# Altium PCB PCB1.PcbDoc
Units mm, origin at the board's own origin, x right, y up, seen from the top; angles counter-clockwise.
Board outline 98.3 x 69.21 mm, 2 copper layers (Top Layer, Bottom Layer); 57 components, 38 nets, 166 pads, 12 vias.
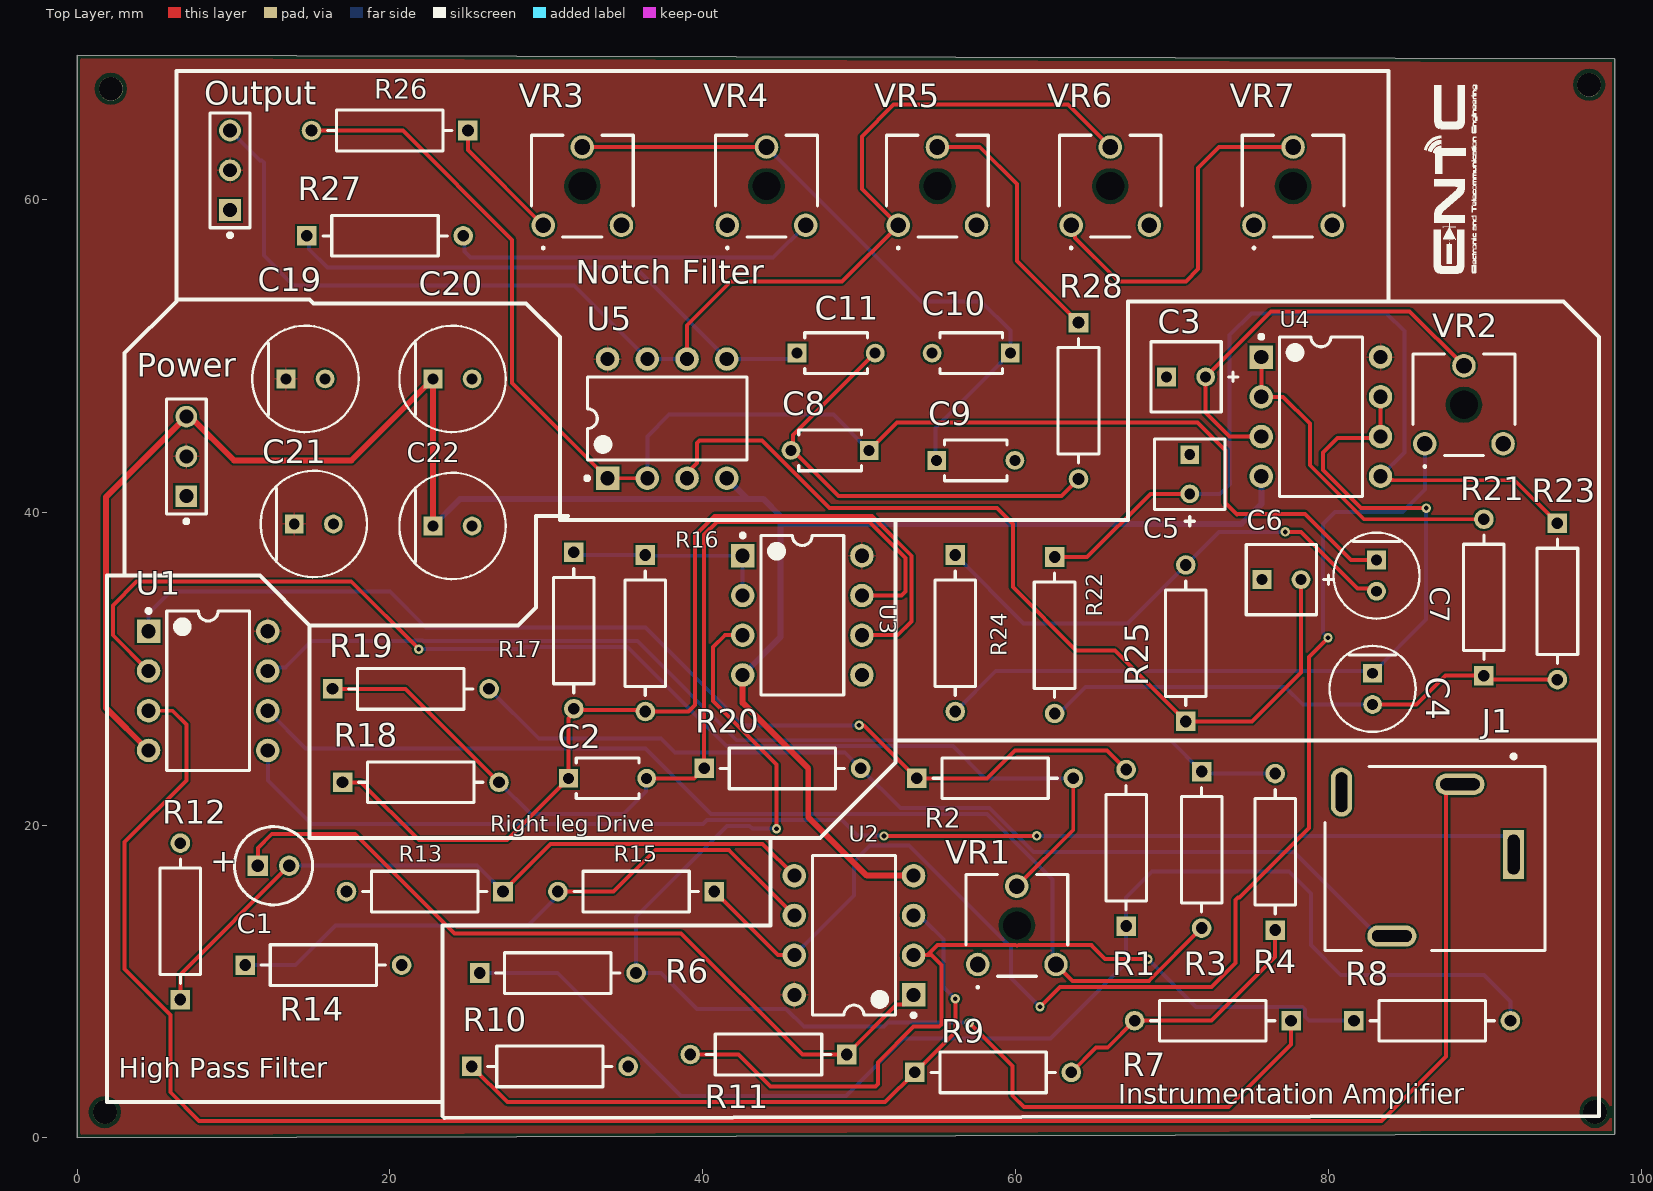
[diagram p0: Top Layer view]
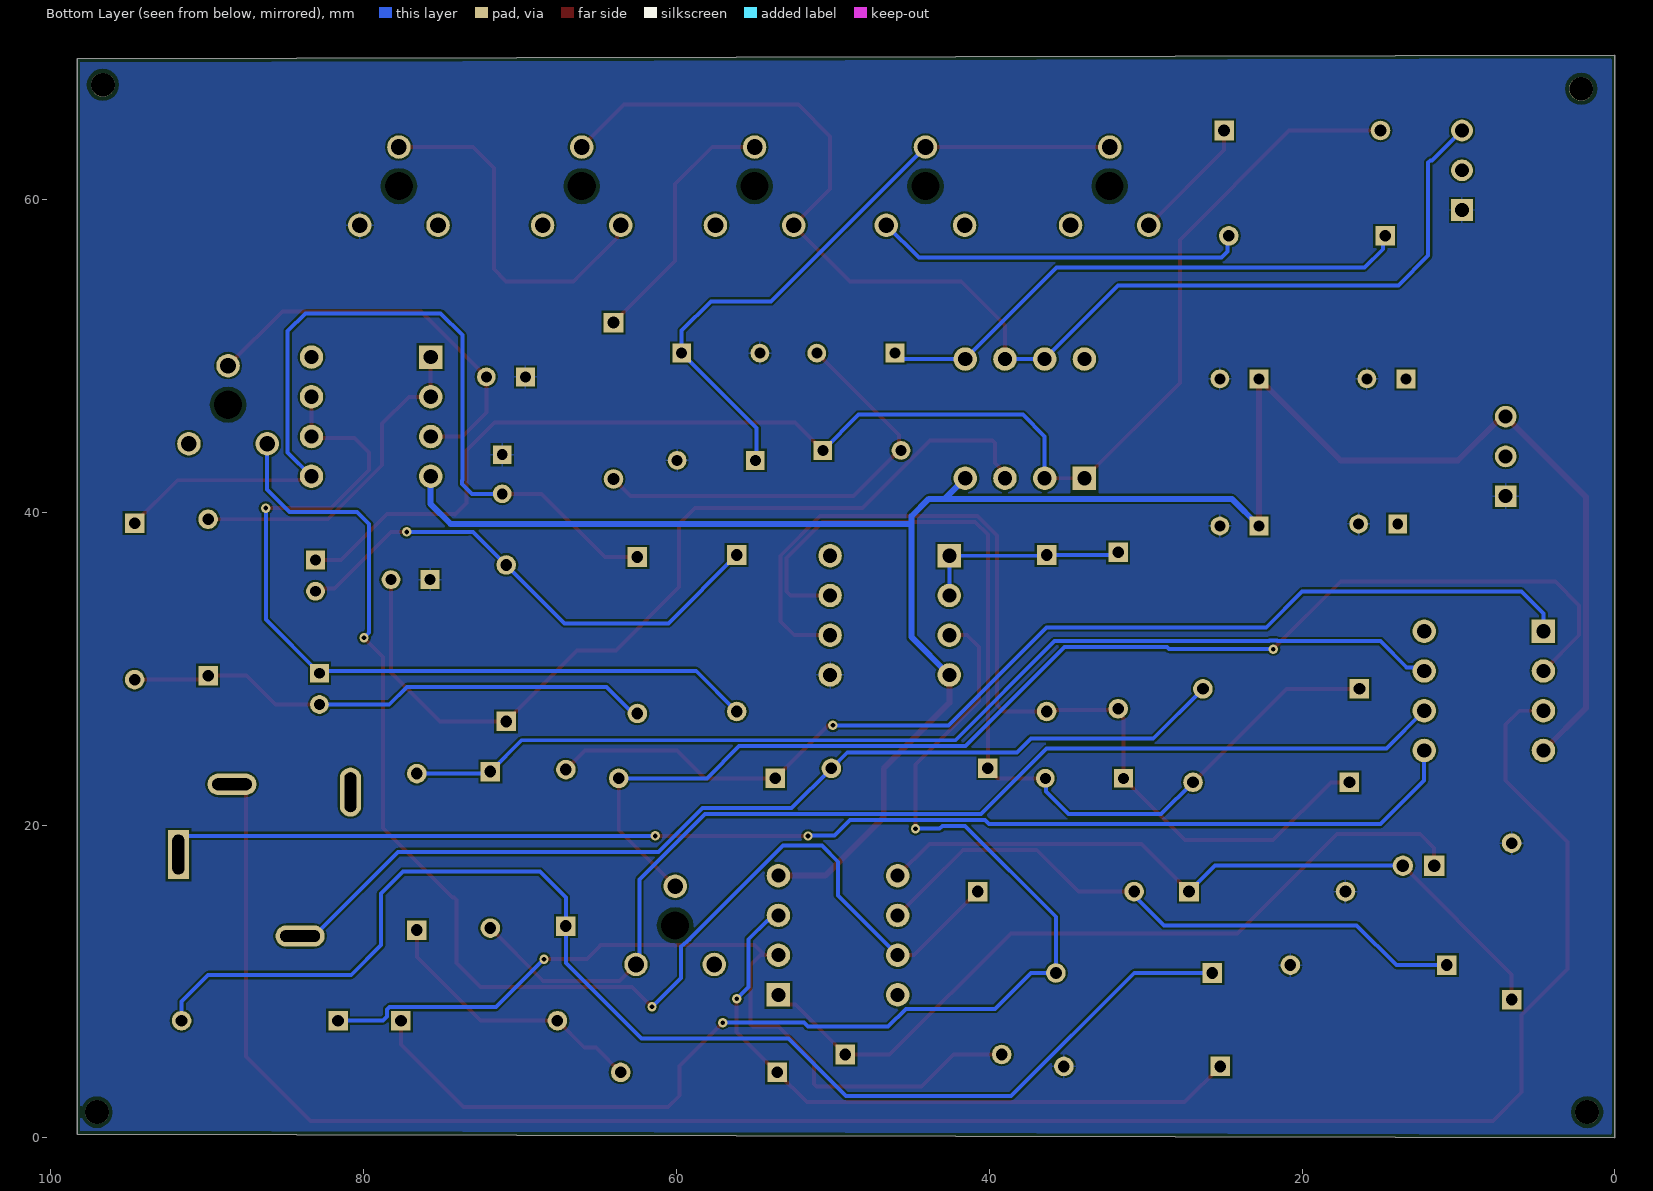
[diagram p1: Bottom Layer view, seen from below]
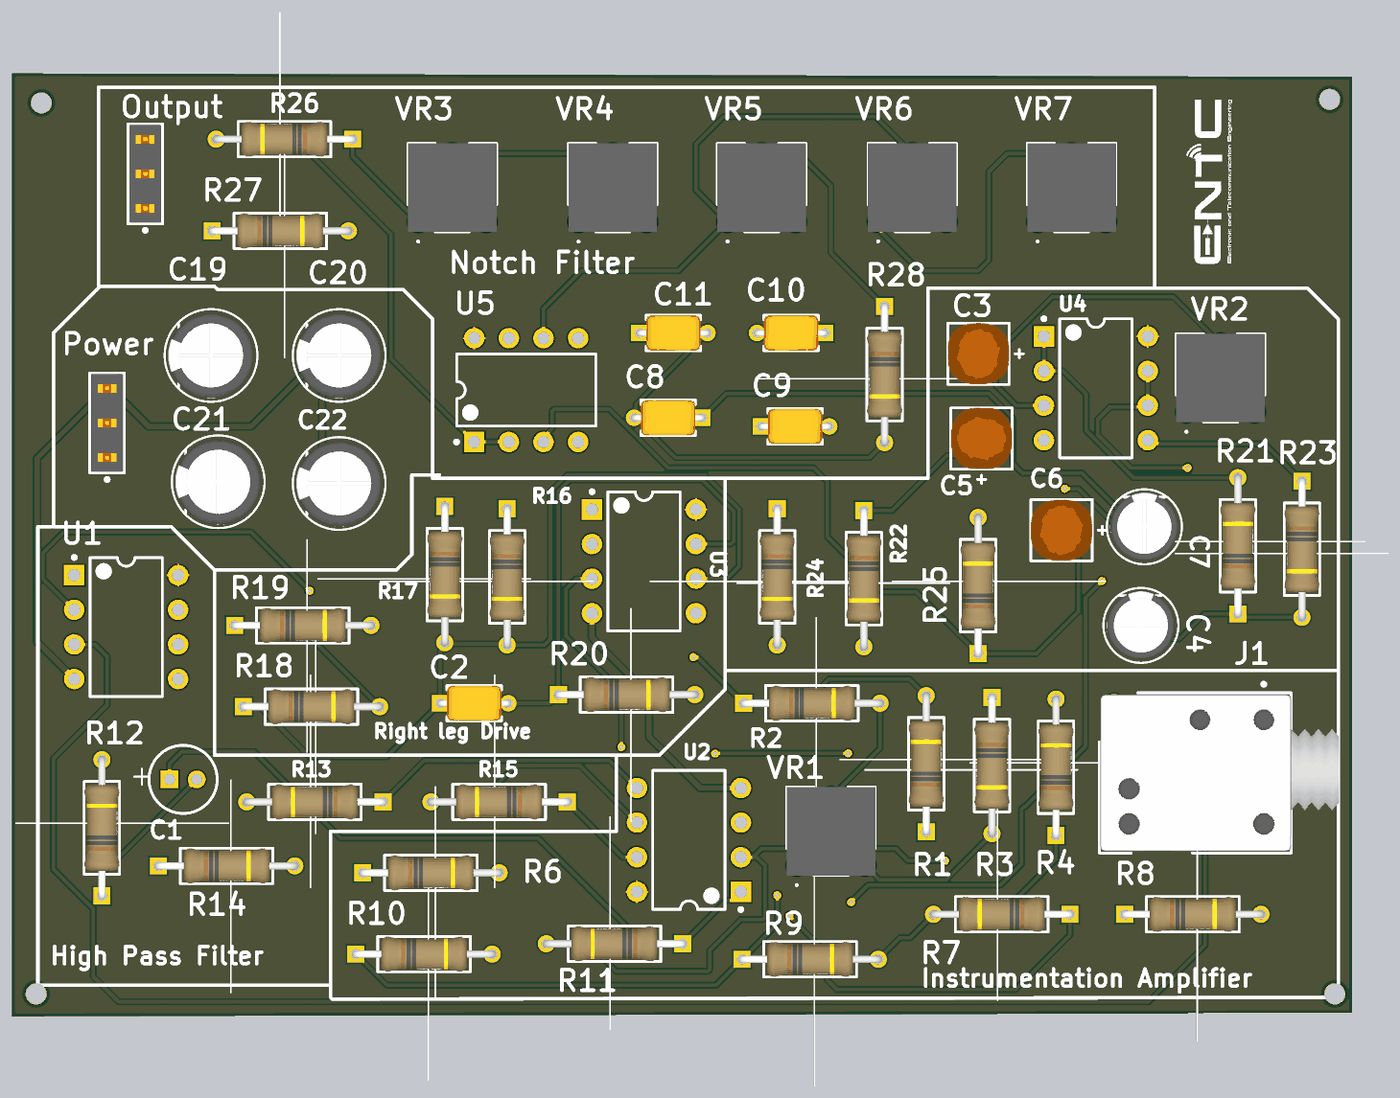
[diagram p2: 3D render of the assembled board from above, using the file's embedded part models]

## Layer stack, top to bottom
Top Solder: solder mask 0.0102, Solder Resist, Dk 3.5
Top Layer: signal copper 0.0356
Dielectric 1: dielectric 0.32, FR-4, Dk 4.8
Bottom Layer: signal copper 0.0356
Bottom Solder: solder mask 0.0102, Solder Resist, Dk 3.5

## Board outline
0,0 98.298,0.247 98.298,68.968 0,69.215

## Design rules (kind name [scope] priority, off if disabled: settings)
BoardOutlineClearance [All] p1: gap=0.2 ignorepadtopadclearanceinfootprint=FALSE
Clearance [All] p1: gap=0.127 ignorepadtopadclearanceinfootprint=FALSE except(0.25: Arc-Hole Track-Hole SMDPad-Hole THPad-Hole Via-Hole Fill-Hole Poly-Hole Region-Hole Text-Hole)
ComponentClearance [All] p1: gap=0.127 collisioncheckmode=3 verticalgap=0.127 showdistances=TRUE
DiffPairsRouting [All] p1: maxlimit=0.254 minlimit=0.127 mostfreqgap=0.127 toplayer_minwidth=0.127 toplayer_maxwidth=25.4 toplayer_prefwidth=0.127 bottomlayer_minwidth=0.127 bottomlayer_maxwidth=25.4 bottomlayer_prefwidth=0.127 maxuncoupledlength=12.7
Height [All] p1: minheight=0 maxheight=1816.048 prefheight=12.7
HoleSize [All] p1: absolutevalues=TRUE maxlimit=6.3 minlimit=0.3 maxpercent=80.000 minpercent=20.000
HoleToHoleClearance [All] p1: gap=0.25 allowstackedmicrovias=FALSE
MinimumAnnularRing [All] p1: minimumring=0.076
MinimumSolderMaskSliver [All] p1: minsoldermaskwidth=0
PlaneClearance [All] p1: clearance=0.127
PlaneConnect PlaneConnectPowerPads [InPadClass('PowerPads')] p1: planeconnectstyle=Direct reliefexpansion=0.508 reliefentries=4 reliefconductorwidth=0.254 reliefairgap=0.254
PlaneConnect [All] p2: pad.planeconnectstyle=Relief pad.reliefexpansion=0.3 pad.reliefentries=4 pad.reliefconductorwidth=0.127 pad.reliefairgap=0.127 via.planeconnectstyle=Direct via.reliefexpansion=0.3 via.reliefentries=4 via.reliefconductorwidth=0.127 via.reliefairgap=0.127
PolygonConnect PolygonConnectPowerPads [All vs (InPadClass('PowerPads'))] p1: connectstyle=Direct reliefconductorwidth=0.254 reliefentries=4 polygonreliefangle="90 Angle" airgapwidth=0.254
PolygonConnect [All] p2: thpad.connectstyle=Relief thpad.reliefconductorwidth=0.127 thpad.reliefentries=4 thpad.polygonreliefangle="90 Angle" thpad.airgapwidth=0.127 smdpad.connectstyle=Relief smdpad.reliefconductorwidth=0.127 smdpad.reliefentries=4 smdpad.polygonreliefangle="90 Angle" smdpad.airgapwidth=0.127 via.connectstyle=Direct via.reliefconductorwidth=0.127 via.reliefentries=4 via.polygonreliefangle="90 Angle" via.airgapwidth=0.127
RoutingVias [All] p1: holewidth=0.3 width=0.6 viastyle="Through Hole" minholewidth=0.3 minwidth=0.6 maxholewidth=0.6 maxwidth=6.6
SilkToSilkClearance [All] p1: silktosilkclearance=0
SilkToSolderMaskClearance [IsPad] p1: minsilkscreentomaskgap=0.127 clearancetoexposedcopper=TRUE
SolderMaskExpansion [All] p1: expansion=0.075 istentingtop=FALSE
Width Width_1 [InNet('-Vcc')] p1: maxlimit=0.5 minlimit=0.254 preferedwidth=0.381 minimp=50.000000 maximp=50.000000 favimp=50.000000
Width [All] p2: maxlimit=25.4 minlimit=0.127 preferedwidth=0.254 minimp=50.000000 maximp=50.000000 favimp=50.000000
20 further rules are at their usual default settings.

## Classes and differential pairs
component class notch+out: C8 C9 C10 C11 Output R26 R27 R28 VR3 VR4 VR5 VR6 VR7
component class LowPassFilter: C3 C4 C5 C6 C7 R21 R22 R23 R24 R25 U4 U5 VR2
component class legdrive: C2 R16 R17 R18 R19 R20 U3
component class InstrumentalAmplifier+in: C19 C20 C21 C22 J1 Power R1 R2 R3 R4 R6 R7 R8 R9 R10 R11 U1 U2 VR1
component class HighPassFilter: C1 R12 R13 R14 R15

## Components (designator, comment, footprint, x,y, rotation, side; value= is the part's Value field where it differs from the comment)
C1 "ECA1HM100" CAPPR55-200-1100X500X1200 12.557,17.399 r0 top
C2 "0.1uF" FP-K15H5-MFG 33.909,22.987 r0 top
C3 "1uF" FP-TAP105K035SCS-MFG 70.886,48.641 r0 top
C4 "0.47uF" FP-RAD-TH-D_5_0_5-L_11_1-MFG 82.804,28.702 r270 top
C5 "1uF" FP-TAP105K035SCS-MFG 71.12,42.418 r270 top
C6 "1uF" FP-TAP105K035SCS-MFG 76.982,35.687 r0 top
C7 "0.47uF" FP-RAD-TH-D_5_0_5-L_11_1-MFG 83.058,35.941 r270 top
C8 ".1uF" FP-K15H5-MFG 48.133,43.942 r180 top
C9 ".1uF" FP-K15H5-MFG 57.444,43.307 r0 top
C10 ".1uF" FP-K15H5-MFG 57.15,50.165 r180 top
C11 ".1uF" FP-K15H5-MFG 48.514,50.165 r0 top
C19 "100uF" FP-RAD-TH-D_6_3_0_5-L_11-MFG 14.605,48.514 r0 top
C20 "100uF" FP-RAD-TH-D_6_3_0_5-L_11-MFG 24.003,48.514 r0 top
C21 "100uF" FP-RAD-TH-D_6_3_0_5-L_11-MFG 15.133,39.243 r0 top
C22 "100uF" FP-RAD-TH-D_6_3_0_5-L_11-MFG 24.003,39.116 r0 top
J1 "35RAPC3BH3" FP-35RAPC3BH3-MFG 88.579,17.871 r180 top
Output "87224-3" FP-87224-3-MFG 9.779,61.849 r90 top
Power "87224-3" FP-87224-3-MFG 6.985,43.561 r90 top
R1 "10K" FP-CFR-25-MFG 67.056,18.542 r90 top
R2 "100K" FP-CFR-25-MFG 58.674,22.987 r0 top
R3 "100K" FP-CFR-25-MFG 71.882,18.415 r270 top
R4 "10K" FP-CFR-25-MFG 76.581,18.288 r90 top
R6 "1M" FP-CFR-25-MFG 30.734,10.541 r0 top
R7 "1M" FP-CFR-25-MFG 72.597,7.493 r180 top
R8 "10K" FP-CFR-25-MFG 86.614,7.493 r0 top
R9 "10K" FP-CFR-25-MFG 58.547,4.191 r0 top
R10 "10K" FP-CFR-25-MFG 30.226,4.572 r0 top
R11 "10K" FP-CFR-25-MFG 44.196,5.334 r180 top
R12 "330k" FP-CFR-25-MFG 6.604,13.843 r90 top
R13 "330k" FP-CFR-25-MFG 22.225,15.748 r180 top
R14 "1k" FP-CFR-25-MFG 15.748,11.049 r0 top
R15 "15k" FP-CFR-25-MFG 35.734,15.748 r180 top
R16 "27k" FP-CFR-25-MFG 36.322,32.258 r270 top
R17 "27k" FP-CFR-25-MFG 31.75,32.432 r270 top
R18 "1M" FP-CFR-25-MFG 21.971,22.733 r0 top
R19 "1M" FP-CFR-25-MFG 21.336,28.702 r0 top
R20 "1M" FP-CFR-25-MFG 45.085,23.622 r0 top
R21 "1k" FP-CFR-25-MFG 89.916,34.544 r90 top
R22 "1k" FP-CFR-25-MFG 62.484,32.131 r270 top
R23 "1k" FP-CFR-25-MFG 94.615,34.29 r270 top
R24 "1k" FP-CFR-25-MFG 56.134,32.258 r270 top
R25 "1k" FP-CFR-25-MFG 70.866,31.623 r90 top
R26 "27K" FP-CFR-25-MFG 19.986,64.389 r180 top
R27 "10k" FP-CFR-25-MFG 19.685,57.658 r0 top
R28 "10k" FP-CFR-25-MFG 64.008,47.117 r270 top
U1 "TL072CP" P0008A 8.382,28.575 r0 top
U2 "TL072CP" P0008A 49.657,12.954 r180 top
U3 "TL072CP" P0008A 46.355,33.401 r0 top
U4 "TL072CP" P0008A 79.502,46.101 r0 top
U5 "TL072CP" P0008A 37.719,45.974 r90 top
VR1 "601030" 601030 57.571,11.089 r0 top
VR2 "601030" 601030 86.146,44.363 r0 top
VR3 "601030" 601030 29.798,58.333 r0 top
VR4 "601030" 601030 41.569,58.333 r0 top
VR5 "601030" 601030 52.491,58.333 r0 top
VR6 "601030" 601030 63.54,58.333 r0 top
VR7 "601030" 601030 75.224,58.333 r0 top

## Footprints (in the part's own frame and the unit in brackets; to place one, negate y for a bottom-side part, rotate by r counter-clockwise, add the part's x,y. Pads: shape width x height; smd on the part's side, far side on the other; paste and mask are expansions set on the pad)
601030 [mm]
  round 1.5 hole 1: 1(0,0) 2(2.5,5) 3(5,0)
  round 0.9 hole 1.8 unplated: MH1(2.5,2.5)
  silkscreen extent -0.75,-1.5 5.75,5.75, body extent -0.75,-0.75 5.75,5.75, height 7.9
CAPPR55-200-1100X500X1200 [mm] "THD, 2-Leads, Dia 5mm, Body Length 11mm"
  rect 1.3x1.3 hole 0.8: 1(-1,0)
  round 1.3 hole 0.8: 2(1,0)
  silkscreen extent -2.5,-2.5 2.5,2.5, body extent -2.5,-2.5 2.5,2.5, height 12
FP-35RAPC3BH3-MFG [mil]
  rect 53.62x123.62 hole 100 slot 30 at 0 deg paste-99999 mask+0: 1(-127.5,-9.5)
  rrect100% 123.62x53.62 hole 100 slot 30 at 90 deg paste-99999 mask+0: 2(178.77,195.5) 5(7.37,-186.41)
  rrect100% 53.62x123.62 hole 100 slot 30 at 0 deg paste-99999 mask+0: 4(305.5,-166.5)
  silkscreen extent -207,-261 347,232, body extent -351,-235 351,235, height 10
FP-87224-3-MFG [mil]
  rect 54.69x54.69 hole 35 paste-99999 mask+0: 1(-100,0)
  round 54.69 hole 35 paste-99999 mask+0: 2(0,0) 3(100,0)
  silkscreen extent -168,-50 145,50, body extent -148,-54 148,54, height 10
FP-CFR-25-MFG [mm]
  rect 1.25x1.25 hole 0.75 paste-2539.97 mask+0: 1(-5,0)
  round 1.25 hole 0.75 paste-2539.97 mask+0: 2(5,0)
  silkscreen extent -3.97,-1.3 3.97,1.3, body extent -5.72,-1.4 5.72,1.4, height 0.25
FP-K15H5-MFG [mm]
  rect 1.2x1.2 hole 0.7 paste-2539.97 mask+0: 1(-2.5,0)
  round 1.2 hole 0.7 paste-2539.97 mask+0: 2(2.5,0)
  silkscreen extent -2,-1.3 2,1.3, body extent -3.2,-1.4 3.2,1.4, height 0.25
FP-RAD-TH-D_5_0_5-L_11_1-MFG [mm]
  rect 1.2x1.2 hole 0.7 paste-2539.97 mask+0: 1(-1,0)
  round 1.2 hole 0.7 paste-2539.97 mask+0: 2(1,0)
  silkscreen extent -2.75,-2.75 2.75,2.75, body extent -2.85,-2.85 2.85,2.85, height 0.25
FP-RAD-TH-D_6_3_0_5-L_11-MFG [mm]
  rect 1.2x1.2 hole 0.7 paste-2539.97 mask+0: 1(-1.25,0)
  round 1.2 hole 0.7 paste-2539.97 mask+0: 2(1.25,0)
  silkscreen extent -3.4,-3.4 3.4,3.4, body extent -3.5,-3.5 3.5,3.5, height 0.25
FP-TAP105K035SCS-MFG [mm]
  rect 1.2x1.2 hole 0.7 paste-2539.97 mask+0: 1(-1.25,0)
  round 1.2 hole 0.7 paste-2539.97 mask+0: 2(1.25,0)
  silkscreen extent -2.25,-2.25 3.3,2.25, body extent -2.35,-2.35 2.35,2.35, height 0.25
P0008A [mm] "DIP, 8-Leads, Body 10.15x6.6mm, Pitch 2.54mm"
  rect 1.5x1.5 hole 0.9: 1(-3.81,3.81)
  round 1.5 hole 0.9: 2(-3.81,1.27) 3(-3.81,-1.27) 4(-3.81,-3.81) 5(3.81,-3.81) 6(3.81,-1.27) 7(3.81,1.27) 8(3.81,3.81)
  silkscreen extent -3.93,-5.1 2.65,5.23, body extent -3.95,-5.07 3.95,5.07, height 5.08

## Part data
C1: library part CMP-1665-00038-2, "Aluminum Electrolytic Capacitor, 10 uF, +/- 20%, 50 V, -40 to 85 degC, 2-Pin THD, RoHS, Bulk", Capacitance=10uF, Case/Package=Radial, Dielectric Material=Aluminium, Leakage Current=3uA, Manufacturer=Panasonic, Max Operating Temperature=85degC, Min Operating Temperature=-40degC, Package Description="2-Pin Radial Lead, Dia 5 mm, Height 12 mm", Package Quantity=200, Package Reference=CAPPR55-200-1100X500X1200, Ripple Current=65mA, Tolerance=20%, Voltage=50V, Datasheet URL=https://industrial.panasonic.com/cdbs/www-data/pdf/RDF0000/ABA0000C1218.pdf, Datasheet Version="Rev. 05, 10/2016", Diameter=5mm, Dissipation Factor=0.12%, Height=11mm, Height - Seated (Max)=0.472inch, Lead Diameter=0.5mm, Lead Free=LeadFree, Lead Pitch=2mm, Lead/Base Style=Straight, Length=11mm, Life (Hours)=2000Hour, Manufacturer URL=http://www.panasonic.com/, Mount=ThroughHole, Number of Pins=2, Packaging=Bulk, Radiation Hardening=No, REACH SVHC=NoSVHC, Ripple Current (AC)=65mA, RoHSCompliant=true, Termination=Radial, Voltage Rating=50V, Voltage Rating (DC)=50V
C2 C8 C9 C10 C11: library part CMP-02417-000048-1, "CAP CER 0.1UF 50V X7R RADIAL", Capacitance=100nF, Case/Package=Dipped, Dielectric=X7R, Max Operating Temperature=125°C, Min Operating Temperature=-55°C, Package Quantity=5000, Tolerance=10%, Voltage=50V, Construction=RADIAL, Depth=2.5mm, Diameter=500um, Height=4mm, Height - Seated (Max)=0.1inch, Lead Diameter=0.5mm, Lead Length=30mm, Lead Pitch=5mm, Lead/Base Style="Formed Leads", Length=4mm, Mount="Through Hole", Packaging=Bulk, Radiation Hardening=No, RoHS Compliant=Yes, Series=K, Termination=Radial, Thickness=2.6mm, Voltage Rating=50V, Voltage Rating (DC)=50V, Weight=0.005644oz, Width=2.5mm
C3 C5 C6: library part CMP-04424-000622-1, "CAP TANT 1UF 10% 35V RADIAL", Case/Package=Dipped, Dielectric Material=Tantalum, ESR (Equivalent Series Resistance)=8R, Leakage Current=500nA, Max Operating Temperature=125°C, Min Operating Temperature=-55°C, Package Quantity=1000, Tolerance=10%, Voltage=20V, Voltage Rating=35V, Capacitance=1uF, Construction=RADIAL, Diameter=4.5mm, Dissipation Factor=4%, Features="General Purpose", Height=7mm, Height - Seated (Max)=0.276inch, Lead Diameter=0.5mm, Lead Free="Lead Free", Lead Pitch=2.5mm, Length=7mm, Life (Hours)=1000Hour, Mount="Through Hole", Number of Pins=2, Packaging=Bulk, Polarity=Polar, Radiation Hardening=No, REACH SVHC="No SVHC", RoHS Compliant=Yes, Series=TAP, Termination=Radial, Voltage Rating (DC)=35V
C4 C7: library part CMP-05427-001047-1, "Aluminum Electrolytic Capacitors (Radial Lead Type) 0.47uF ±20% 63V", Capacitance=470nF, Case/Package=Radial, Leakage Current=3uA, Max Operating Temperature=105°C, Min Operating Temperature=-40°C, Package Quantity=200, Ripple Current=4.5mA, Tolerance=20%, Voltage=63V, Construction=RADIAL, Diameter=5mm, Height=11mm, Height - Seated (Max)=0.433inch, Lead Diameter=0.5mm, Lead Free="Lead Free", Lead Pitch=2mm, Length=11mm, Life (Hours)=5000Hour, Mount="Through Hole", Number of Pins=2, Packaging=Bulk, Polarity=Polar, Radiation Hardening=No, REACH SVHC="No SVHC", Ripple Current (AC)=4.5mA, RoHS Compliant=Yes, Series=EB, Termination=Radial, Voltage Rating=63V, Voltage Rating (DC)=63V
C19 C20 C21 C22: library part CMP-05427-000237-1, "Aluminum Electrolytic Capacitors (Radial Lead Type) 4.7uF ±20% 160V", Capacitance=4.7uF, Case/Package=Radial, Dielectric Material=Aluminium, Max Operating Temperature=105°C, Min Operating Temperature=-25°C, Package Quantity=200, Ripple Current=43mA, Tolerance=20%, Voltage=160V, Construction=RADIAL, Diameter=6.3mm, Dissipation Factor=0.15%, Height=11.2mm, Height - Seated (Max)=0.48inch, Lead Diameter=0.5mm, Lead Free="Lead Free", Lead Pitch=2.5mm, Lead/Base Style=Straight, Length=11.2mm, Life (Hours)=2000Hour, Mount="Through Hole", Number of Pins=2, Packaging=Bulk, Radiation Hardening=No, REACH SVHC="No SVHC", Ripple Current (AC)=43mA, RoHS Compliant=Yes, Series=NHG, Termination=Radial, Voltage Rating=160V, Voltage Rating (DC)=160V, Weight=0.01lb, Width=0.25inch
J1: library part CMP-47983-000003-1, "CONN JACK STEREO 3.5MM R/A", Body Color=Black, Package Quantity=1, Voltage Rating=500V, Body Material=Brass, Color=Black, Contact Material="Copper Alloy", Contact Plating=Silver, Gender=Female, Housing Material=PBT, Lead Free="Lead Free", Mount="Through Hole", Number of Ports=1, Number of Positions=3, Number of Terminals/Pins=3, Orientation="Right Angle", Packaging=Bulk, RoHS Compliant=Yes, Series=35, Shielding=Unshielded, Termination=Solder
Output Power: library part CMP-2000-05697-2, "CONN HEADER VERT 3POS 2.54MM", Color=Black, Contact Current Rating=3A, Flammability Rating="UL94 V-0", High Temperature Housing=No, Max Operating Temperature=105°C, Min Operating Temperature=-65°C, Package Quantity=520, Approvals=CSA, Board Standoff="No (Without)", Connector Type=Plug, Contact Gender=Male, Contact Material=Bronze, Contact Mating Length=8.08mm, Contact Plating=Gold, Contact Post Length=0.125inch, Contact Protection="No (Without)", Contact Shape=Square, Contact Type="Male Pin", Current Rating=3A, Depth=2.54mm, ELV=Compliant, Gasket="No (Without)", High Speed Serial Data Connector=No, Housing Color=Black, Housing Material=Thermoplastic, Keyed=No, Lead Free="Lead Free", Length=7.21mm, Mating Alignment="No (Without)", Mating Connector Lock="No (Without)", Mount="Through Hole", Number of Contacts=3, Number of Positions=3, Number of Rows=1, Orientation=Straight, Packaging=Carton, PCB Mount Retention=Without, PCB Mounting Orientation=Vertical, PCB Thickness=1.397mm, Pitch=2.54mm, Radiation Hardening=No, RoHS Compliant=Yes, Row Spacing=2.54mm, Selectively Loaded="No (Without)", Series="AMPMODU MOD II", Stabilizers="No (Without)", Strain Relief="No (Without)", Termination="Through Hole"
R1 R2 R3 R4 R6 R7 R8 R9 R10 R11 R12 R13 R14 R15 R16 R17 R18 R19 R20 R21 R22 R23 R24 R25 R26 R27 R28: library part CMP-03413-000009-1, "RES 10 OHM 1/4W 5% AXIAL", Case/Package=Axial, Max Operating Temperature=155°C, Max Power Dissipation=250mW, Min Operating Temperature=-55°C, Package Quantity=200, Resistance=10R, Resistor Type="Carbon Film", Temperature Coefficient=500ppm/°C, Tolerance=5%, Length=0.248inch, Number of Terminations=2, Packaging=Bulk, RoHS Compliant=Yes, Series="Carbon Film"
U1 U2 U3 U4 U5: library part CMP-0017-00950-2, "Dual Low-Noise JFET-Input General-Purpose Operational Amplifier, 7 to 36 V, 0 to 70 degC, 8-pin DIP (P8), Pb-Free (RoHS)", Manufacturer="Texas Instruments", Rating=Catalog, Total Supply Voltage(Max)(+5V is 5, +/-5V is 10)=36, Total Supply Voltage(Min)(+5V is 5, +/-5V is 10)=7, CMRR(Min)(dB)=70, Code_JEDEC=MS-001, ComponentLink1Description="Manufacturer URL", ComponentLink1URL=http://www.ti.com/, ComponentLink2Description=Datasheet, ComponentLink2URL=http://www.ti.com/lit/ds/symlink/tl072.pdf, ComponentLink3Description="Package Specification", ComponentLink3URL=http://www.ti.com/litv/pdf/mpdi001b, DatasheetVersion=SLOS080J, Eco-Plan="Pb-Free (RoHS)", GBW(Typ)(MHz)=3, IIB(Max)(pA)=200, Iq per channel(Max)(mA)=2.5, Mounting Technology="Through Hole", Number of Channels=2, Offset Drift(Typ)(uV/C)=18, PackageDescription="8-Pin Plastic In-Line, Body 9.59 x 6.35 mm, Pitch 2.54 mm", PackageReference=P0008A, PackageVersion="4040082/E, 04/2010", PartNumber=TL072CP, Slew Rate(Typ)(V/us)=13, Sub Family="General Purpose Amplifier, High Supply Voltage Amplifier (>=30V)", Vio (25C)(Max)(mV)=10, Vn at 1kHz(Typ)(nV/rtHz)=18
VR1 VR2 VR3 VR4 VR5 VR6 VR7: "Variable Resistor", Manufacturer_Name=AVX, Mouser Part Number=581-601030, Datasheet Link=https://www.abelektronik.de/fileadmin/images/Produkte_und_Datenblaetter/Datenblaetter/Bauelemente/E_HA06.pdf, Height=7.8mm, Manufacturer_Part_Number=601030, Mouser Price/Stock=https://www.mouser.co.uk/ProductDetail/AVX/601030?qs=B6kkDfuK7%2FDwxok08zuurA%3D%3D

## Free pads (board coordinates)
  round 1.524 hole 1.524: 4(2.159,67.056) 6(96.647,67.31) 7(1.778,1.651) 9(97.028,1.651)

## Via types
v1: diameter 0.6, hole 0.3, Top Layer to Bottom Layer, 12 vias

## Nets (pads, with @x,y where several pads share a name; then routed paths per layer and width w, separated by ;. In a path a pad name is that pad's centre, name@x,y a point inside that pad or via, vN(x,y) a via of type N, cw(c..) or ccw(c..) an arc to the next point about the centre after c; other vN are vias at no path point)
+Vcc: C19.1 C21.1 Output.2 Power.2 U1.8 U2.8 U3.8 U4.8 U5.8
-Vcc: C20.1 C22.1 Power.3 U1.4 U2.4 U3.4 U4.4 U5.4 | length 141.6
  Top Layer w0.381: U1.4 1.841,27.495 1.841,40.957 Power.3 7.239,46.101 10.033,43.307 17.546,43.307 C20.1 C22.1 ; U3.4 42.545,27.813 46.736,23.622 46.736,20.509 50.481,16.764 U2.4
  Bottom Layer w0.381: C22.1 24.487,40.85 42.843,40.85 ; U5.4 42.843,40.85 ; U3.4 44.958,32.004 44.958,39.243 ; U4.4 75.692,40.513 74.422,39.243 44.958,39.243 ; 42.843,40.85 43.859,40.85 44.958,39.751 44.958,39.243
GND: C3.1 C5.1 C6.1 C9.2 C10.2 C19.2 C20.2 C21.2 C22.2 Output.1 Power.1 R10.2 R12.2 R13.2 R14.2 U3.5 VR7.3
"high pass out": R15.1 U2.7 VR2.1 | length 86.8
  Top Layer w0.254: R15.1 44.798,11.684 U2.7 ; v1(61.546,8.381) 62.817,9.652 72.517,9.652 74.041,11.176 74.041,15.218 74.19,15.367 74.295,15.367 78.74,19.812 78.74,30.747 v1(79.956,31.963)
  Bottom Layer w0.254: U2.7 49.657,15.494 49.657,17.653 50.695,18.691 53.171,18.691 59.087,12.775 ccw(c60.071,13.589) 59.255,12.607 59.257,12.605 59.541,12.37 59.69,12.221 59.69,10.238 59.764,10.163 v1(61.546,8.381) ; v1(79.956,31.963) 79.629,32.29 79.629,39.243 80.391,40.005 84.709,40.005 86.146,41.442 VR2.1
InstrumentalOut: C1.1 R11.1 U2.1 | length 50.8
  Top Layer w0.254: C1.1 11.557,18.542 12.446,19.431 17.78,19.431 24.13,13.081 38.608,13.081 46.355,5.334 R11.1 52.383,8.521 52.844,8.521 U2.1
LA: J1.5 U1.3 | length 131.1
  Top Layer w0.254: U1.3 6.096,27.305 6.985,26.416 6.985,22.86 3.048,18.923 3.048,10.79 5.969,7.869 5.969,2.921 7.81,1.079 83.376,1.079 87.503,5.207 87.503,22.094 88.015,22.606 J1.5
LegIn: R6.2 R7.1 U3.3 | length 80.5
  Top Layer w0.254: U3.3 41.402,32.131 40.64,31.369 40.64,27.94 44.704,23.876 v1(44.704,19.766) ; v1(57.023,7.366) 59.787,4.602 59.787,2.697 60.515,1.968 73.596,1.968 77.597,5.969 R7.1
  Bottom Layer w0.254: v1(44.704,19.766) 43.16,19.766 42.987,19.939 41.536,19.939 35.734,14.137 R6.2 37.338,10.541 39.624,8.255 45.316,8.255 46.459,7.112 51.567,7.112 51.821,7.366 v1(57.023,7.366)
LL: J1.2 R19.2 R20.2 | length 64.2
  Bottom Layer w0.254: R19.2 29.511,25.527 37.338,25.527 38.227,24.638 49.069,24.638 R20.2 52.625,21.082 58.324,21.082 61.131,18.274 77.78,18.274 83.149,12.905 J1.2
"low pass out": C7.1 C8.1 R26.2 U5.1 U5.2 | length 93.2
  Top Layer w0.254: R26.2 20.828,64.389 27.813,57.404 27.813,48.26 U5.1 U5.2 ; C8.1 52.411,45.72 71.628,45.72 73.406,43.942 73.406,40.596 74.146,39.856 74.168,39.878 78.486,39.878 81.423,36.941 C7.1
  Bottom Layer w0.254: U5.2 36.449,44.831 37.846,46.228 48.347,46.228 C8.1
NetC1_2: C1.2 R12.1 R13.1 U2.5 | length 46.5
  Top Layer w0.254: R12.1 6.604,10.446 C1.2 ; R13.1 30.273,18.796 43.815,18.796 U2.5
  Bottom Layer w0.254: C1.2 25.574,17.399 R13.1
NetC2_1: C2.1 R16.2 R17.2 R18.1 U3.6 | length 64.1
  Top Layer w0.254: R18.1 18.161,22.733 21.844,19.05 27.472,19.05 C2.1 31.409,26.821 31.75,27.162 R17.2 31.837,27.345 36.235,27.345 R16.2 39.069,27.258 39.497,27.686 39.497,38.512 40.736,39.751 50.8,39.751 53.34,37.211 53.34,33.02 52.451,32.131 U3.6
NetC2_2: C2.2 R18.2 R19.1 R20.1 U3.7 | length 62.9
  Top Layer w0.254: R19.1 21.002,28.702 R18.2 ; C2.2 39.45,22.987 R20.1 40.085,38.561 40.894,39.37 50.642,39.37 52.959,37.053 52.959,34.925 52.705,34.671 U3.7
  Bottom Layer w0.254: R18.2 29.003,20.701 34.925,20.701 36.379,22.155 36.379,22.957 C2.2
NetC3_2: C3.2 U4.3 VR2.2 | length 26.2
  Top Layer w0.254: U4.3 73.66,44.831 72.136,46.355 C3.2 76.327,52.832 85.177,52.832 VR2.2
NetC4_1: C4.1 R24.2 U4.6 U4.7 | length 55.2
  Top Layer w0.254: U4.7 U4.6 83.219,44.738 80.552,44.738 79.629,43.815 79.629,42.703 82.073,40.259 v1(86.233,40.259)
  Bottom Layer w0.254: R24.2 58.721,29.845 82.661,29.845 C4.1 86.233,33.131 v1(86.233,40.259)
NetC4_2: C4.2 R21.1 R22.2 R23.2 | length 34.2
  Top Layer w0.254: C4.2 85.614,27.702 87.456,29.544 R21.1 90.17,29.29 R23.2
  Bottom Layer w0.254: R22.2 62.754,27.131 64.452,28.829 77.216,28.829 78.343,27.702 C4.2
NetC5_2: C5.2 R22.1 R23.1 U4.5 | length 57.3
  Top Layer w0.254: R22.1 64.563,37.131 68.6,41.168 C5.2 ; U4.5 83.55,42.053 84.068,42.053 84.084,42.037 91.868,42.037 R23.1
  Bottom Layer w0.254: C5.2 73.045,41.168 73.682,41.805 73.682,42.015 73.66,42.037 73.66,51.308 75.057,52.705 83.693,52.705 84.836,51.562 84.836,43.815 U4.5
NetC6_2: C6.2 R25.1 U5.3 | length 58.2
  Top Layer w0.254: U5.3 38.989,42.493 39.624,43.128 39.624,44.428 39.773,44.577 43.79,44.577 48.108,40.259 58.801,40.259 59.817,39.243 59.817,35.201 63.857,31.161 66.328,31.161 R25.1 75.104,26.623 78.232,29.751 C6.2
NetC7_2: C7.2 R24.1 R25.2 | length 32.7
  Top Layer w0.254: v1(77.229,38.735) 78.232,38.735 81.845,35.122 82.877,35.122 C7.2
  Bottom Layer w0.254: R24.1 60.499,32.893 67.136,32.893 R25.2 72.978,38.735 73.279,38.735 v1(77.229,38.735)
NetC8_2: C8.2 C11.2 R28.2 | length 28.5
  Top Layer w0.254: C11.2 45.772,44.923 45.772,44.081 C8.2 45.751,43.942 48.672,41.021 62.912,41.021 R28.2
NetC9_1: C9.1 C10.1 VR3.2 VR4.2 | length 42.5
  Top Layer w0.254: VR3.2 VR4.2
  Bottom Layer w0.254: VR4.2 53.935,53.467 57.785,53.467 59.65,51.602 C10.1 54.864,45.379 54.864,43.387 C9.1
NetC11_1: C11.1 R27.1 U5.5 | length 35.2
  Bottom Layer w0.254: R27.1 14.827,57.516 14.827,56.801 16.002,55.626 35.687,55.626 U5.5 45.633,49.784 C11.1
NetR1_1: R1.1 R6.1 R8.2 | length 84.1
  Bottom Layer w0.254: R6.1 30.726,10.541 38.6,2.667 49.149,2.667 52.832,6.35 62.23,6.35 67.056,11.176 R1.1 67.056,15.367 68.707,17.018 77.47,17.018 78.867,15.621 78.867,12.319 80.772,10.414 89.916,10.414 91.614,8.716 R8.2
NetR1_2: R1.2 R2.1 U1.1 | length 70.4
  Top Layer w0.254: v1(49.984,26.368) 50.293,26.368 R2.1 58.166,22.987 59.944,24.765 65.833,24.765 R1.2
  Bottom Layer w0.254: U1.1 4.572,33.528 5.969,34.925 20.002,34.925 22.288,32.639 36.322,32.639 42.593,26.368 v1(49.984,26.368)
NetR2_2: R2.2 U1.2 VR1.2 | length 80.9
  Top Layer w0.254: U1.2 2.286,32.131 2.286,34.036 3.81,35.56 17.526,35.56 v1(21.844,31.242) ; VR1.2 63.674,19.692 R2.2
  Bottom Layer w0.254: v1(21.844,31.242) 28.495,31.242 28.622,31.369 35.179,31.369 41.511,25.037 55.989,25.037 58.039,22.987 R2.2
NetR3_1: R3.1 R4.2 U1.7 | length 68.7
  Bottom Layer w0.254: U1.7 12.43,30.083 13.319,30.083 14.986,31.75 21.569,31.75 21.615,31.796 22.073,31.796 22.119,31.75 35.814,31.75 42.146,25.418 69.878,25.418 R3.1 72.009,23.288 R4.2
NetR3_2: R3.2 U1.6 VR1.3 | length 71.3
  Top Layer w0.254: VR1.3 63.627,10.033 68.5,10.033 R3.2
  Bottom Layer w0.254: U1.6 14.605,24.892 36.322,24.892 40.513,20.701 58.166,20.701 62.357,16.51 62.357,11.303 VR1.3
NetR4_1: R4.1 R7.2 R9.2 | length 17.8
  Top Layer w0.254: R9.2 65.131,5.775 65.879,5.775 R7.2 72.517,7.493 76.581,11.557 R4.1
NetR8_1: R8.1 R11.2 U2.2 | length 55
  Top Layer w0.254: R11.2 42.291,5.334 44.323,3.302 51.032,3.302 51.181,3.451 51.181,4.826 53.467,7.112 55.096,7.112 55.245,7.261 55.245,11.049 54.61,11.684 54.356,11.684 ; U2.2 54.356,11.684 ; v1(68.453,11.43) 65.714,11.43 64.899,12.245 64.825,12.319 60.205,12.319 cw(c60.071,13.589) 59.937,12.319 54.991,12.319 54.356,11.684
  Bottom Layer w0.254: v1(68.453,11.43) 71.511,8.372 78.327,8.372 78.476,8.223 78.476,7.757 78.74,7.493 R8.1
NetR9_1: R9.1 R10.1 U2.3 | length 42.5
  Top Layer w0.254: R10.1 27.512,2.286 51.642,2.286 R9.1 56.134,6.778 v1(56.134,8.89)
  Bottom Layer w0.254: U2.3 53.804,14.224 54.159,13.869 54.203,13.869 55.372,12.7 55.372,9.652 v1(56.134,8.89)
NetR14_1: R14.1 R15.2 U2.6 | length 40
  Top Layer w0.254: R15.2 34.29,15.748 36.957,18.415 41.656,18.415 44.002,16.069 U2.6
  Bottom Layer w0.254: R14.1 13.97,11.049 16.51,13.589 28.829,13.589 30.734,15.494 R15.2
NetR16_1: R16.1 R17.1 U3.1 U3.2 | length 13.4
  Bottom Layer w0.254: R17.1 31.924,37.258 R16.1 36.369,37.211 U3.1 U3.2
NetR21_2: R21.2 U4.1 U4.2 | length 21.6
  Top Layer w0.254: U4.1 U4.2 77.089,47.371 78.797,45.663 78.797,42.996 82.249,39.544 R21.2
NetR26_1: R26.1 VR3.1 | length 8
  Top Layer w0.254: R26.1 24.986,63.145 VR3.1
NetR27_2: R27.2 VR4.3 | length 23.9
  Bottom Layer w0.254: R27.2 24.755,57.588 24.755,56.652 25.146,56.261 44.497,56.261 VR4.3
NetR28_1: R28.1 VR5.2 | length 16.5
  Top Layer w0.254: VR5.2 57.698,63.333 60.071,60.96 60.071,56.054 R28.1
NetVR6_1: VR6.1 VR7.2 | length 23.4
  Top Layer w0.254: VR6.1 63.778,58.095 63.778,57.528 66.421,54.886 66.57,54.737 70.866,54.737 71.657,55.528 71.657,62.005 72.985,63.333 VR7.2
Output: Output.3 U5.6 U5.7 VR5.1 VR6.2 | length 81.5
  Top Layer w0.254: U5.6 38.989,51.943 41.783,54.737 48.895,54.737 VR5.1 50.165,60.659 50.165,64.008 52.197,66.04 63.333,66.04 VR6.2
  Bottom Layer w0.254: Output.3 11.684,62.484 11.789,62.484 11.938,62.335 11.938,56.388 13.843,54.483 31.75,54.483 U5.7 U5.6
RA: J1.1 U1.5 | length 84.1
  Top Layer w0.254: v1(51.575,19.297) 51.578,19.301 61.338,19.301 v1(61.341,19.304)
  Bottom Layer w0.254: U1.5 12.192,22.86 14.986,20.066 40.005,20.066 40.259,20.32 48.895,20.32 49.894,19.321 51.552,19.321 v1(51.575,19.297) ; v1(61.341,19.304) 91.264,19.304 91.818,18.75 J1.1
pads on no net: J1.4 VR1.1 VR1.MH1 VR2.3 VR2.MH1 VR3.3 VR3.MH1 VR4.1 VR4.MH1 VR5.3 VR5.MH1 VR6.3 VR6.MH1 VR7.1 VR7.MH1

## Polygon pours and split planes (outlines as drawn)
GND on Bottom Layer "GND_L02_P001" (solid, pour order 1): 0,0 101.219,0 101.219,0.127 101.219,69.215 0,69.215
+Vcc on Top Layer "+VCC_L01_P000" (solid, pour order 0): 0,0 101.219,0 101.219,0.127 101.219,69.215 0,69.215

## Silkscreen, mask and mechanical layers (free items; w line width, h text height)
Top Overlay:
  drawing of 97 lines, arcs and shapes, not listed
  text "Notch Filter" at 31.877,54.61 h1.52
  text "Right leg Drive" at 26.416,19.558 h1.02
  text "High Pass Filter" at 2.667,3.852 h1.27
  text "Instrumentation Amplifier" at 66.548,2.201 h1.27
Mechanical 13:
  lines w0.254: 0,0 98.298,0 98.298,69.215 0,69.215 0,0

## Text inside footprints (layer, text, board x,y; h text height)
C1: Top Overlay "+" at 8.509,17.018 h1.5